# Altium PCB Digital_Potentiometer.PcbDoc
Units mil, origin at the board's own origin, x right, y up, seen from the top; angles counter-clockwise.
Board outline 800 x 1100 mil, 2 copper layers (Top Layer, Bottom Layer); 8 components, 9 nets, 40 pads, 0 vias.
Unrouted connection lines stored in the file: 5.
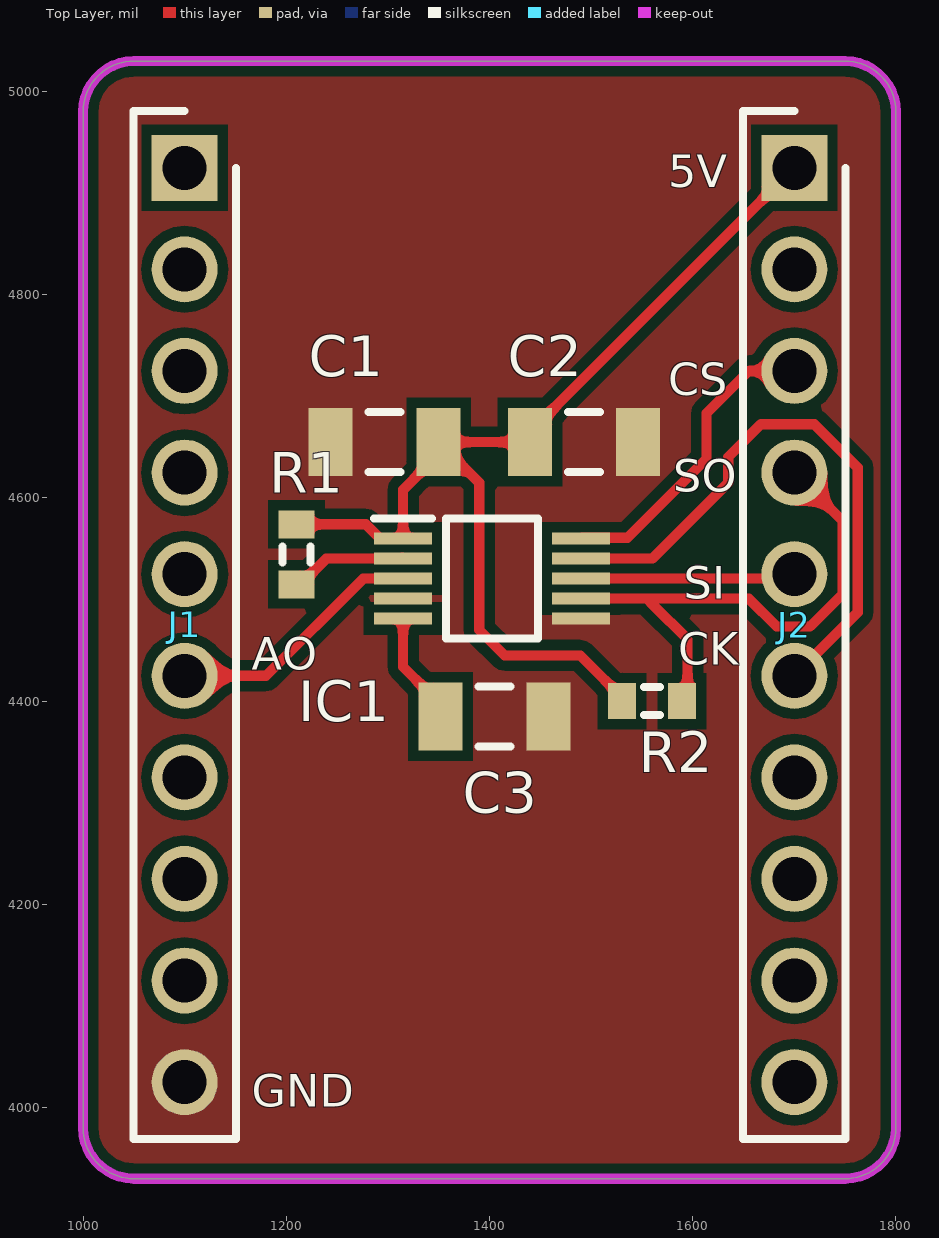
[diagram p0: Top Layer view]
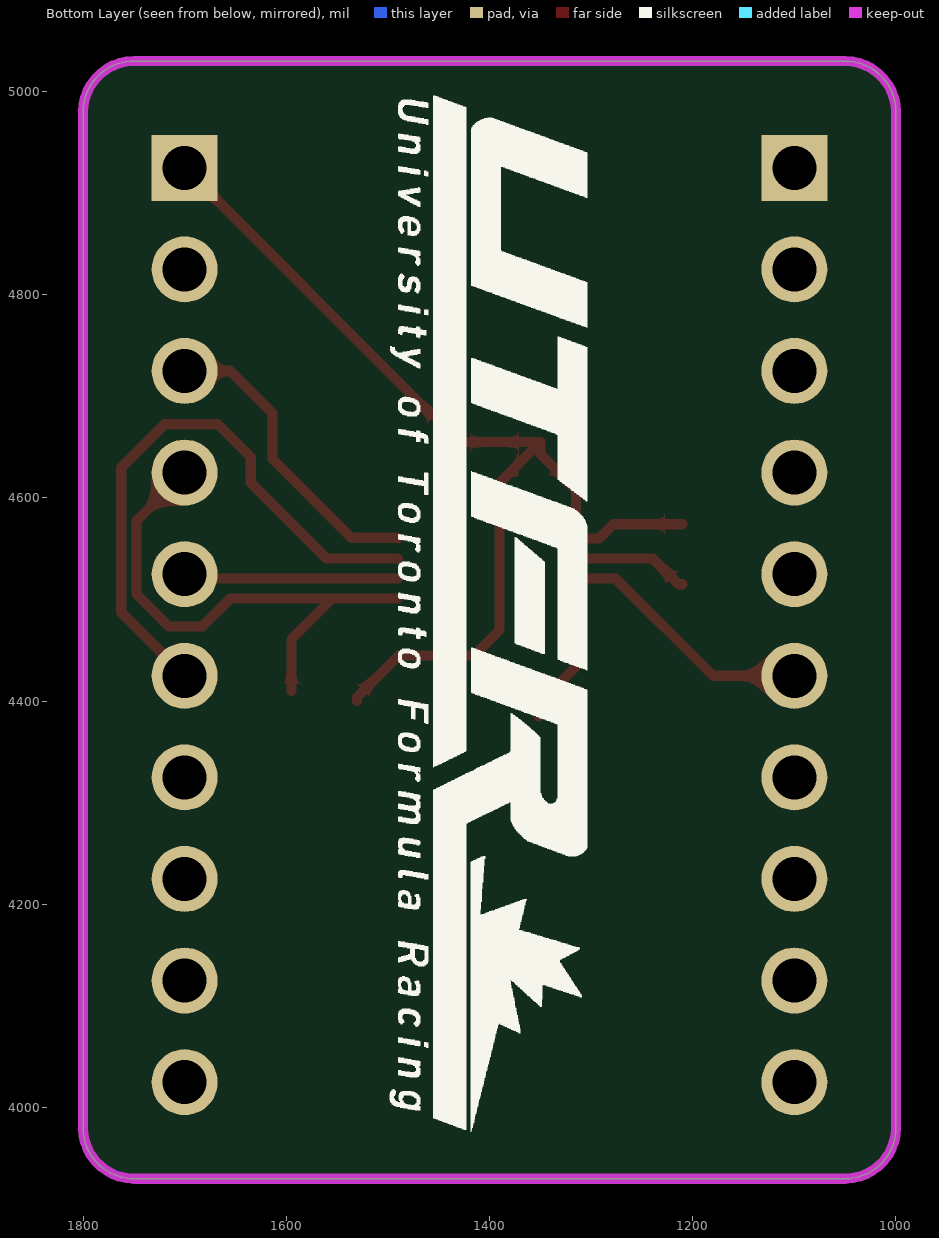
[diagram p1: Bottom Layer view, seen from below]

## Layer stack, top to bottom
Top Solder: solder mask 0.4, Solder Resist, Dk 3.5
Top Layer: signal copper 1.4
Dielectric 1: dielectric 12.6, FR-4, Dk 4.8
Bottom Layer: signal copper 1.4
Bottom Solder: solder mask 0.4, Solder Resist, Dk 3.5

## Board outline
1050,3930 cw(c1050,3980) 1000,3980 1000,4980 cw(c1050,4980) 1050,5030 1750,5030 cw(c1750,4980) 1800,4980 1800,3980 cw(c1750,3980) 1750,3930

## Design rules (kind name [scope] priority, off if disabled: settings)
Clearance [All] p1: gap=10 ignorepadtopadclearanceinfootprint=FALSE except(0: Arc-Hole Track-Hole SMDPad-Hole THPad-Hole Via-Hole Fill-Hole Poly-Hole Region-Hole Text-Hole; 5: Arc-Arc Arc-Track Arc-SMDPad Track-Track Track-SMDPad SMDPad-SMDPad)
PolygonConnect PolygonConnect_2 [All vs IsNamedPolygon('INV_AGND_L01_P001')] p1: connectstyle=Direct reliefconductorwidth=10 reliefentries=4 polygonreliefangle="90 Angle" airgapwidth=10
PolygonConnect PolygonConnect_1 [All vs IsNamedPolygon('NONET_L01_P000')] p2: connectstyle=Direct reliefconductorwidth=10 reliefentries=4 polygonreliefangle="90 Angle" airgapwidth=10
PolygonConnect [All] p3: connectstyle=Relief reliefconductorwidth=10 reliefentries=4 polygonreliefangle="90 Angle" airgapwidth=10
RoutingVias [All] p1: holewidth=28 width=50 viastyle="Through Hole" minholewidth=28 minwidth=50 maxholewidth=28 maxwidth=50
SolderMaskExpansion [All] p1: expansion=4 istentingtop=FALSE
Width [All] p1: maxlimit=10 minlimit=10 preferedwidth=10
30 further rules are at their usual default settings.

## Classes and differential pairs
component class Digital_Potentiometer: C1 C2 C3 IC1 J1 R1 R2

## Components (designator, comment, footprint, x,y, rotation, side; value= is the part's Value field where it differs from the comment)
C1 "10uF" C1206 1296.85,4655 r180 top value=100nF
C2 "0.1uF" C1206 1493.15,4655 r0 top value=100nF
C3 "1uF, >7V" C1206 1405,4385 r180 top value=100nF
IC1 "AD5270BRMZ-20-RL7" SOP50P490X110-10N 1402.6,4520.63 r0 top
J1 "68000-210HLF" HDRV10W63P0X254_1X10_2540X241X858P 1100,4925 r270 top
J2 "68000-210HLF" HDRV10W63P0X254_1X10_2540X241X858P 1700,4925 r270 top
R1 "220" J1-0603 1210,4544.53 r90 top
R2 "10K" J1-0603 1560,4400 r180 top value=220

## Footprints (in the part's own frame and the unit in brackets; to place one, negate y for a bottom-side part, rotate by r counter-clockwise, add the part's x,y. Pads: shape width x height; smd on the part's side, far side on the other; paste and mask are expansions set on the pad)
C1206 [mm] "Chip Capacitor, Body 3.2x1.6mm, IPC High Density"
  rect 1.1x1.7 smd: 1(-1.35,0) 2(1.35,0)
  silkscreen extent -0.4,-0.75 0.4,0.75, body extent -1.7,-0.9 1.7,0.9, height 1.3
HDRV10W63P0X254_1X10_2540X241X858P [mm]
  rect 1.65x1.65 hole 1.1: 1(0,0)
  round 1.65 hole 1.1: 2(2.54,0) 3(5.08,0) 4(7.62,0) 5(10.16,0) 6(12.7,0) 7(15.24,0) 8(17.78,0) 9(20.32,0) 10(22.86,0)
  silkscreen extent -1.42,-1.28 24.28,1.28, body extent -1.27,-1.2 24.13,1.2, height 8.58
J1-0603 [mm] "Chip Resistor, Body 1.6x0.8mm, IPC High Density"
  rect 0.7x0.9 smd: 1(-0.75,0) 2(0.75,0)
  silkscreen extent -0.2,-0.35 0.2,0.35, body extent -0.85,-0.48 0.85,0.48, height 0.9
SOP50P490X110-10N [mm]
  rect 1.45x0.3 smd: 1(-2.225,1) 2(-2.225,0.5) 3(-2.225,0) 4(-2.225,-0.5) 5(-2.225,-1) 6(2.225,-1) 7(2.225,-0.5) 8(2.225,0) 9(2.225,0.5) 10(2.225,1)
  silkscreen extent -2.95,-1.5 1.15,1.5, body extent -2.45,-1.5 2.45,1.5, height 1.1

## Part data
C1 C2 C3: library part "Cap Semi", "Capacitor (Semiconductor SIM Model)", LatestRevisionDate=29-May-2009, LatestRevisionNote="IPC-7351 Footprint Added.", PackageDescription="Chip Capacitor", PackageReference=C1206, Published=8-Jun-2000, Publisher="Altium Limited"
IC1: "Integrated Circuit", Manufacturer_Name="Analog Devices", Mouser Part Number=584-AD5270BRMZ-20-R7, Arrow Part Number=AD5270BRMZ-20-RL7, Arrow Price/Stock=https://www.arrow.com/en/products/ad5270brmz-20-rl7/analog-devices?region=nac, Datasheet Link=https://componentsearchengine.com/Datasheets/1/AD5270BRMZ-20-RL7.pdf, Height=1.1mm, Manufacturer_Part_Number=AD5270BRMZ-20-RL7, Mouser Price/Stock=https://www.mouser.co.uk/ProductDetail/Analog-Devices/AD5270BRMZ-20-RL7?qs=NmRFExCfTkGXQbgPC%2Fq9Tw%3D%3D
J1 J2: "Connector", Manufacturer_Name=Amphenol, Mouser Part Number=649-68000-210HLF, Arrow Part Number=68000-210HLF, Arrow Price/Stock=https://www.arrow.com/en/products/68000-210hlf/amphenol-fci, Datasheet Link=https://cdn.amphenol-icc.com/media/wysiwyg/files/drawing/68000.pdf, Height=8.58mm, Manufacturer_Part_Number=68000-210HLF, Mouser Price/Stock=https://www.mouser.co.uk/ProductDetail/Amphenol-FCI/68000-210HLF?qs=QKvFUfBIyQINb7f%2F4SDc2A%3D%3D
R1 R2: library part Res3, "Resistor", LatestRevisionDate=29-May-2009, LatestRevisionNote="IPC-7351 Footprint Added.", PackageDescription="Chip Resistor", PackageReference=J1-0603, Published=8-Jun-2000, Publisher="Altium Limited"

## Nets (pads, with @x,y where several pads share a name; then routed paths per layer and width w, separated by ;. In a path a pad name is that pad's centre, name@x,y a point inside that pad or via, vN(x,y) a via of type N, cw(c..) or ccw(c..) an arc to the next point about the centre after c; other vN are vias at no path point)
APPS_Out_Analog: IC1.3 J1.6 | length 254.6
  Top Layer w10: J1.6 1180,4425 1275.63,4520.63 IC1.3
Arduino_5V: C1.1 C2.1 IC1.1 J2.1 R1.2 R2.2 | length 1062.4
  Top Layer w10: R1.2 1278.31,4574.06 1292.36,4560 IC1.1 1315,4608.19 1350,4643.19 C1.1 ; R2.2 1530.47,4403.94 1489.41,4445 1415,4445 1390,4470 1390,4615 C1.1 ; J2.1 1458.46,4683.46 1456.65,4683.46 1440,4666.81 C2.1 C1.1
CS_DPOT: IC1.10 J2.3 | length 304.4
  Top Layer w10: IC1.10 1491.1,4560.91 1535.91,4560.91 1613.65,4638.65 1613.65,4683.45 1655.2,4725 J2.3
INV_AGND: C1.2 C2.2 C3.1 IC1.4 IC1.6 J1.10
MISO_Micro: IC1.7 J2.4 R2.1 | length 528.2
  Top Layer w10: IC1.7 1655.15,4500.94 1682.66,4473.44 1715.58,4473.44 1747.48,4505.33 1747.48,4577.52 J2.4 ; 1555.37,4500.47 1560.85,4495 1595,4460.85 R2.1@1595,4409.95
MOSI_Micro: IC1.8 J2.5 | length 214.1
  Top Layer w10: IC1.8 1695.63,4520.63 J2.5
  Bottom Layer w10: J2.5@1697.5,4525 J2.5
NetC3_2: C3.2 IC1.5 | length 111.5
  Top Layer w10: IC1.5 1315,4433.66 1351.85,4396.81 C3.2
NetIC1_2: IC1.2 R1.1 | length 116.2
  Top Layer w10: R1.1 1213.94,4515 1239.25,4540.31 1313.19,4540.31 1314.09,4541.22 IC1.2
SCK_Micro: IC1.9 J2.6 | length 598.3
  Top Layer w10: IC1.9 1560.31,4540.31 1635,4615 1635,4640.32 1667.16,4672.48 1719.67,4672.48 1762.48,4629.67 1762.48,4487.48 J2.6
  Bottom Layer w10: J2.6 J2.6@1700,4433.18
pads on no net: J1.1 J1.2 J1.3 J1.4 J1.5 J1.7 J1.8 J1.9 J2.2 J2.7 J2.8 J2.9 J2.10

## Polygon pours and split planes (outlines as drawn)
INV_AGND on Top Layer "INV_AGND_L01_P001" (solid, remove dead copper, pour order 1): 1000,3930 1800,3930 1800,5030 1000,5030

## Keep-outs
Keep-Out Layer:
  the board outline again, w10

## Silkscreen, mask and mechanical layers (free items; w line width, h text height)
Top Overlay:
  text "5V" at 1576,4906 h32
  text "CS" at 1576,4701 h32
  text "SO" at 1581,4606 h32
  text "SI" at 1591,4501 h32
  text "CK" at 1586,4436 h32
  text "AO" at 1166,4431 h32
  text "GND" at 1166,4001 h32
Bottom Overlay:
  drawing of 42 lines, arcs and shapes, not listed